# EAGLE board SO-8 (EAGLE 6.6.0)
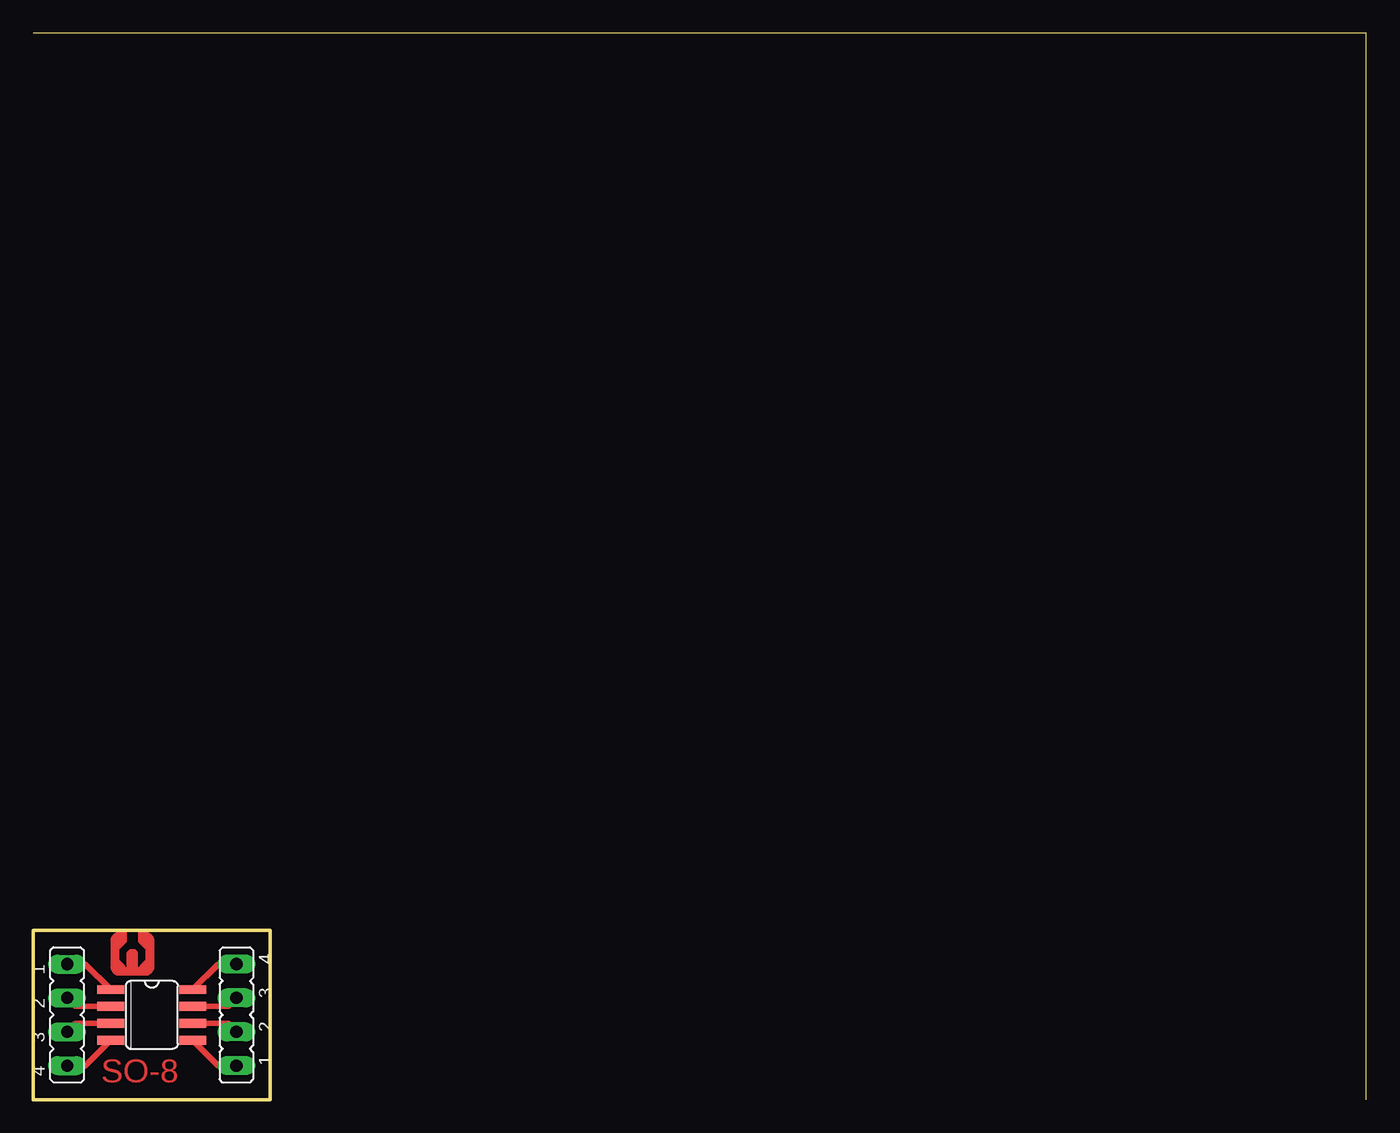
[diagram p0: board, top side]

Size 100 x 80 mm. Coordinates in mm from the lower left corner, seen from the top.
Outline: 100,0 100,80 0,80
Outline: 0,0 0,12.7 17.78,12.7 17.78,0 0,0
Copper layers (1*16): Top 0.035mm / dielectric 1.5mm / Bottom 0.035mm
Design rules "default": minimum track width 10mil, minimum drill 24mil, track to track 8mil, track to pad 8mil, pad to pad 8mil, via to via 8mil, smd to smd 8mil, copper to edge 40mil, drill to drill 8mil, minimum pad ring 10mil, minimum via ring 8mil, stop-mask expansion 4mil, vias tented up to drill 0mil, thermal gap 10mil

## Footprints (pad centres in the part's own frame; a part is rotated, then mirrored left to right if it is on the bottom)
SO08 = smd 0.66 x 2.032: 1 -1.905,-3.073; 2 -0.635,-3.073; 3 0.635,-3.073; 4 1.905,-3.073; 5 1.905,3.073; 6 0.635,3.073; 7 -0.635,3.073; 8 -1.905,3.073
JP4 = drill 0.914 long: 1 -3.81,0; 2 -1.27,0; 3 1.27,0; 4 3.81,0

## Placement (x,y rotation side)
IC1  [SO08]  8.89,6.35 270 top
JP1  [JP4]  2.54,6.35 270 top
JP2  [JP4]  15.24,6.35 90 top

## Library data of the parts
IC1 = maxim; OC_FARNELL: unknown; OC_NEWARK: unknown
JP1 JP2 = jumper

## Nets
N$1: IC1.1 JP1.1
N$2: IC1.2 JP1.2
N$3: IC1.3 JP1.3
N$4: IC1.4 JP1.4
N$5: IC1.5 JP2.1
N$6: IC1.6 JP2.2
N$7: IC1.7 JP2.3
N$9: IC1.8 JP2.4

## Tracks (layer width: path | path; a pad name or v marks a point on that pad's centre or on a via)
N$1
  Top 0.406: IC1.1 3.91,10.16 JP1.1
N$2
  Top 0.406: IC1.2 3.17,6.99 JP1.2
N$3
  Top 0.406: IC1.3 3.17,5.71 JP1.3
N$4
  Top 0.406: IC1.4 3.91,2.54 JP1.4
N$5
  Top 0.406: IC1.5 13.87,2.54 JP2.1
N$6
  Top 0.406: IC1.6 14.61,5.71 JP2.2
N$7
  Top 0.406: IC1.7 14.61,6.99 JP2.3
N$9
  Top 0.406: IC1.8 13.87,10.16 JP2.4
(copper drawn outside any net)
  shapes: Top area x289

## Text on the board
Top: SO-8